# Altium PCB CopterControl.PcbDoc (part 2 of 2)
Units mil, origin at the board's own origin, x right, y up, seen from the top; angles counter-clockwise.
Board outline 1417.32 x 1417.32 mil, 4 copper layers (Top Layer, Ground, Power, Bottom Layer); 93 components, 79 nets, 390 pads, 96 vias.
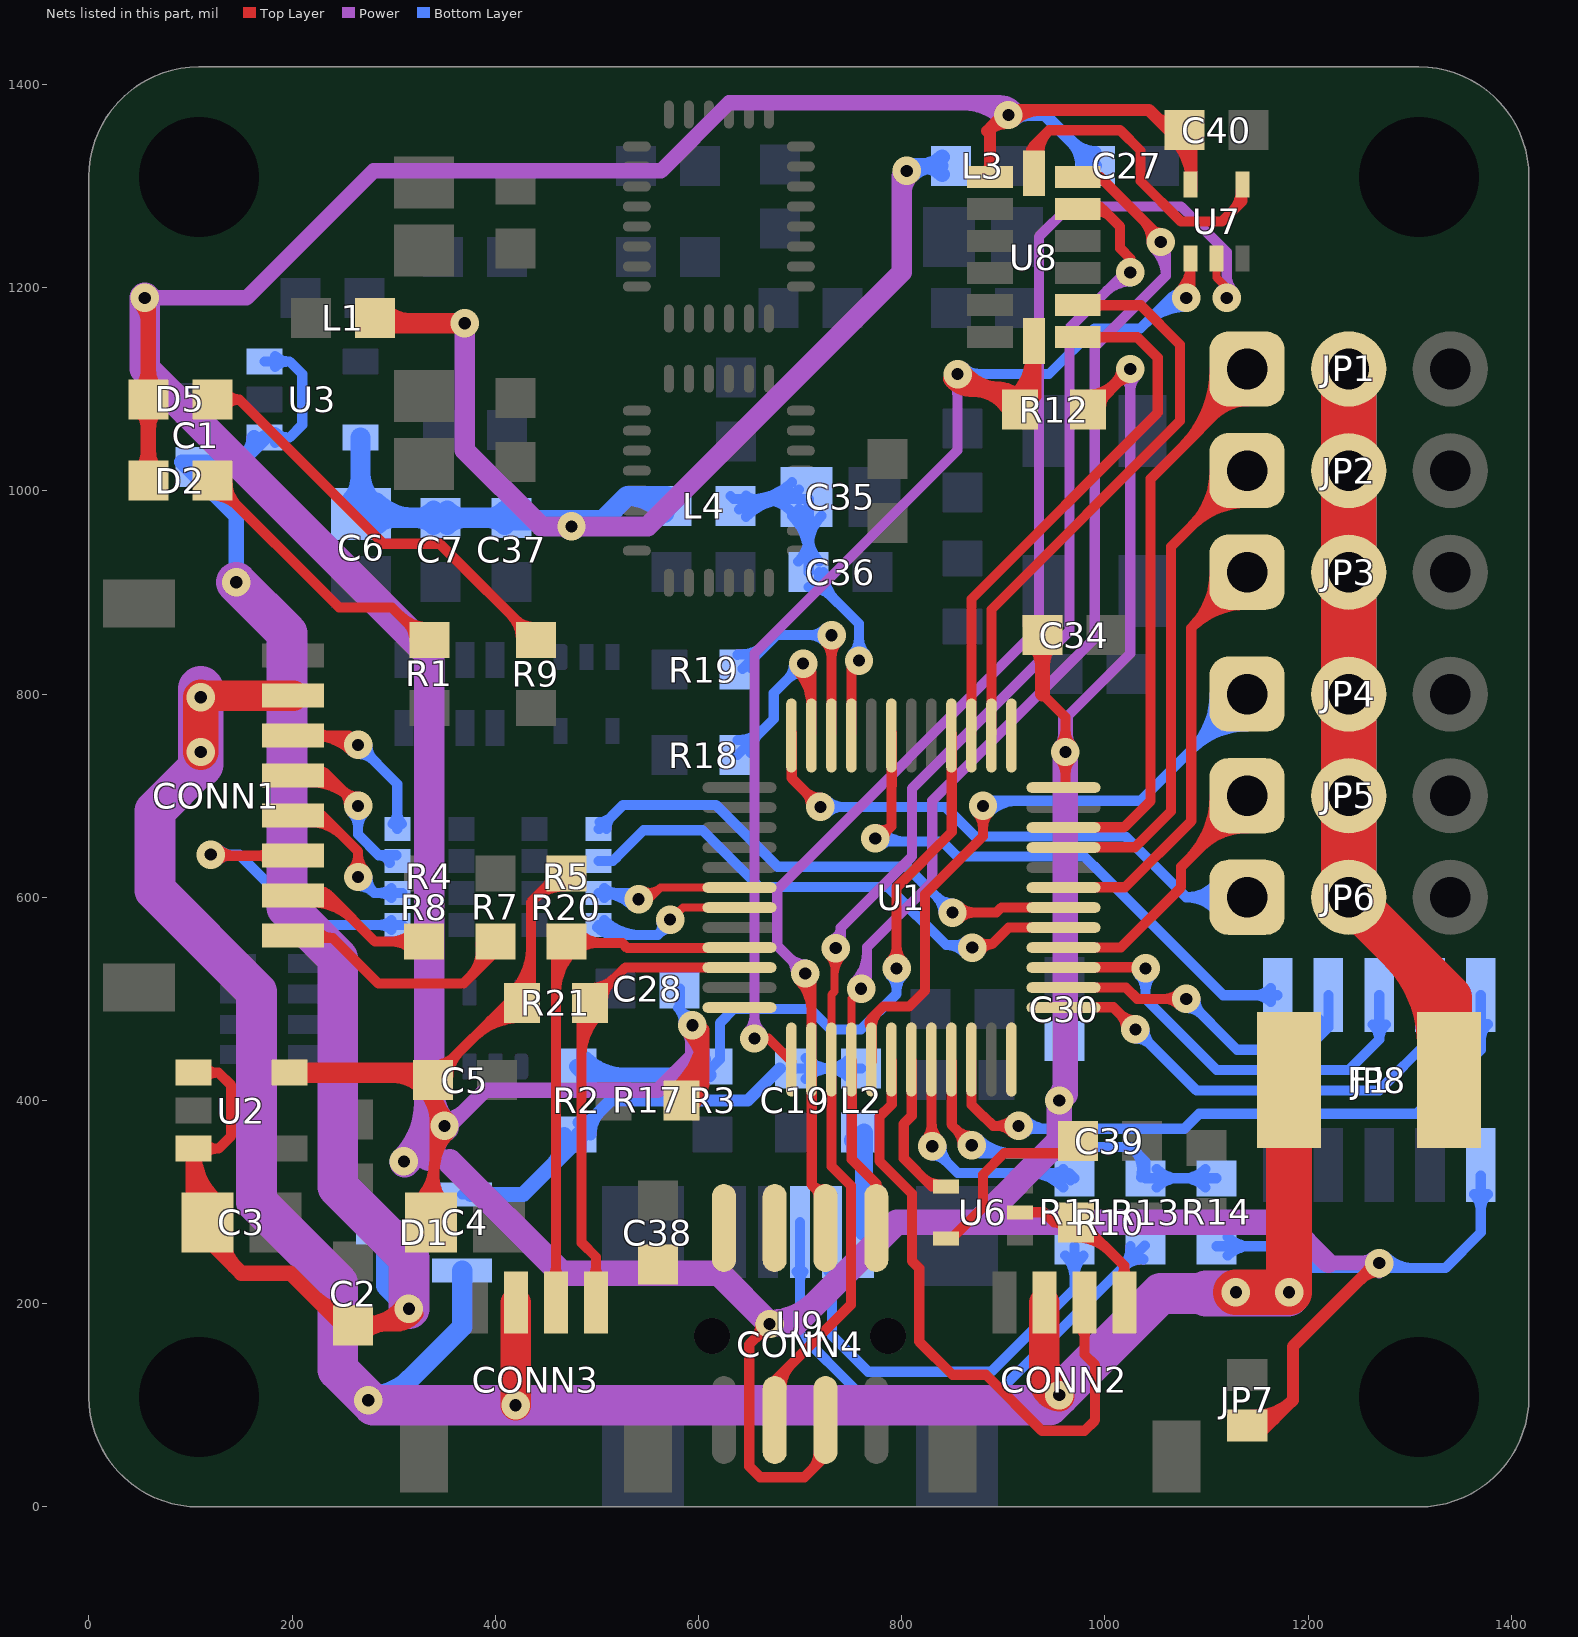
[diagram p4: the nets of this part, all layers, seen from the top]

## Via types
v1: diameter 28, hole 12, Top Layer to Bottom Layer, tented both sides, 96 vias

## Nets (pads, with @x,y where several pads share a name; then routed paths per layer and width w, separated by ;. In a path a pad name is that pad's centre, name@x,y a point inside that pad or via, vN(x,y) a via of type N, cw(c..) or ccw(c..) an arc to the next point about the centre after c; other vN are vias at no path point) (continued)
NetC35_2: C35.2 C36.2 L4.2 U1.9 | length 768.6
  Top Layer w10: U1.9@750.54,761.17 750.54,825.54 v1(758,833)
  Bottom Layer w10: L4.2@631.5,995 634.46,992.03 708.5,992.03 C36.2@708.5,920 ; L4.2@639.81,981.69 cw(c664.78,956.71) 664.78,992.03 ; L4.2@646.88,974.62 cw(c688.92,932.57) C35.2@688.92,992.03 ; L4.2@646.88,995.38 ccw(c654.97,1003.48) L4.2@654.97,992.03 ; L4.2@652.07,992.03 ccw(c652.07,1048.46) C35.2@691.98,1008.56 ; 661.58,992.03 cw(c661.58,949.04) C35.2@691.98,979.44 ; 676.22,992.03 ccw(c676.22,1024.32) C35.2@699.05,1001.49 ; C35.2@691.98,975.5 cw(c652.07,935.6) C36.2@708.5,935.6 ; C36.2@698.12,930.38 ccw(c673.05,955.45) 708.5,955.45 ccw(c743.96,955.45) C36.2@718.89,930.38 ; C35.2@699.05,982.57 cw(c676.22,959.74) 708.5,959.74 ; C36.2@708.5,905.31 cw(c708.5,873.05) 731.32,895.86 ; 708.5,945.11 cw(c751.49,945.11) C35.2@721.1,975.5 ; C36.2@718.5,920 718.5,908.68 758,869.18 v1(758,833) v1@755,830 ; C36.2@723.19,920 ccw(c761.83,920) 734.51,892.68 ; v1@751.64,839.36 ccw(c736.27,854.73) 758,854.73 ccw(c779.73,854.73) v1@764.36,839.36
NetCONN1_3: CONN1.3 R4.8 | length 315.9
  Top Layer w10: CONN1.3@201.1,759.06 255.94,759.06 v1(265,750) ; CONN1.3@221.41,759.06 cw(c221.41,706.41) v1@258.64,743.64 ; CONN1.3@224.62,754.24 cw(c236.25,742.61) 236.25,759.06 cw(c236.25,775.5) CONN1.3@224.62,763.87 ; 245.55,759.06 cw(c245.55,730.55) v1@265.71,750.71
  Bottom Layer w10: v1@265,741 cw(c265,719.27) 280.36,734.64 cw(c295.73,750) v1@274,750 ; v1(265,750) 303.5,711.5 R4.8@303.5,667.24 ; R4.8@298.69,672.06 ccw(c287.06,683.69) 303.5,683.69 ccw(c319.95,683.69) R4.8@308.32,672.06
NetCONN1_4: CONN1.4 R4.7 | length 361.3
  Top Layer w10: CONN1.4@201.1,719.69 235.32,719.69 ; CONN1.4@218.06,722.36 cw(c225.15,711.46) 234.35,720.65 ; CONN1.4@219.8,712.87 cw(c219.8,658.98) v1@257.91,697.09 ; CONN1.4@219.8,722.87 cw(c219.8,693.12) 240.84,714.16 ; CONN1.4@223.52,713.98 cw(c232.03,700.89) 243.07,711.93 ; CONN1.4@224.82,715.08 cw(c235.31,705.43) 235.31,719.68 ; CONN1.4@224.82,724.29 ccw(c235.31,733.94) 235.31,719.69 ; v1@256,690 ccw(c234.27,690) 249.64,705.36 ccw(c265,720.73) v1@265,699 ; v1(265,690) 235.32,719.69
  Bottom Layer w10: v1@258.64,683.64 cw(c243.27,668.27) 265,668.27 cw(c286.73,668.27) v1@271.36,683.64 ; v1(265,690) 265,661.77 285.32,641.45 ; R4.7@296.04,633.65 ccw(c285.32,630.19) 285.32,641.45 ; R4.7@302.8,641.45 285.32,641.45
NetCONN1_5: CONN1.5 R4.6 | length 279.3
  Top Layer w10: CONN1.5@201.1,680.31 229.68,680.31 265,645 v1(265,620) ; CONN1.5@219.8,673.5 cw(c219.8,633.2) 248.3,661.7 ; v1@258.64,626.36 ccw(c243.27,641.73) 265,641.73 ccw(c286.73,641.73) v1@271.36,626.36
  Bottom Layer w10: v1@265,611 cw(c265,589.27) 280.36,604.64 cw(c295.73,620) v1@274,620 ; v1(265,620) 280.75,604.25 R4.6@308.5,604.25 ; R4.6@297.7,599.44 ccw(c286.08,587.81) 286.08,604.25 ccw(c286.08,620.7) R4.6@297.7,609.07
NetCONN1_6: CONN1.6 R4.5 | length 418.2
  Top Layer w10: v1@120,640.94 CONN1.6@201.1,640.94 ; v1@126.36,635.64 cw(c139.18,622.82) 139.18,640.94 ; v1@126.36,648.36 ccw(c144.28,666.28) 144.28,640.94 ; CONN1.6@177.59,636.13 ccw(c165.96,624.5) 165.96,640.94 ccw(c165.96,657.39) CONN1.6@177.59,645.76
  Bottom Layer w10: v1(120,642) 148,642 217.24,572.76 R4.5@308.5,572.76 ; v1@126.36,635.64 cw(c141.73,620.27) 141.73,642 cw(c141.73,663.73) v1@126.36,648.36 ; R4.5@297.7,567.94 ccw(c286.08,556.31) 286.08,572.76 ccw(c286.08,589.2) R4.5@297.7,577.57
NetCONN1_7: CONN1.7 R8.2 | length 333.9
  Top Layer w10: CONN1.7@201.1,601.57 236.43,601.57 281.46,556.54 R8.2@330,556.54 ; CONN1.7@218.13,604.29 cw(c225.64,592.08) 235.78,602.22 ; CONN1.7@219.8,594.76 cw(c219.8,538.19) 259.81,578.19 ; CONN1.7@219.8,604.76 cw(c219.8,572.33) 242.73,595.27 ; CONN1.7@223.37,595.77 cw(c232.47,580.99) 244.74,593.26 ; CONN1.7@224.62,596.76 cw(c236.25,585.13) 236.25,601.57 cw(c236.25,618.02) CONN1.7@224.62,606.39 ; R8.2@319.04,547.54 ccw(c297.33,525.84) 297.33,556.54 ccw(c297.33,587.24) R8.2@319.04,565.53
NetCONN1_8: CONN1.8 R7.2 | length 309.9
  Top Layer w10: CONN1.8@201.1,562.2 201.1,559.9 240.1,559.9 ; CONN1.8@224.89,566.73 ccw(c240.1,580.24) 240.1,559.9 ; 374.45,520.99 ccw(c346.77,548.67) R7.2@385.46,554.61 ; 388.41,534.95 ccw(c370.97,552.38) R7.2@395.35,556.12 ; R7.2@400,546.54 368.46,515 285,515 240.1,559.9
NetCONN2_4: CONN2.4 R10.2 U6.2 | length 278.5
  Top Layer w10: U6.2@916.42,290 940,290 950,280 ; R10.2@960.4,273.86 ccw(c950,268.12) 950,280 ; R10.2@960.4,286.14 cw(c950,291.88) 950,280 ; R10.2@971.54,265.31 cw(c971.54,217.79) 1005.14,251.4 ; R10.2@971.54,275.31 cw(c971.54,251.93) R10.2@988.07,268.47 ; R10.2@984.25,278.03 ccw(c998.13,278.03) R10.2@988.32,268.22 ; CONN2.4@1014.24,224.62 ccw(c1002.61,236.25) 1019.06,236.25 ccw(c1035.5,236.25) CONN2.4@1023.87,224.62 ; CONN2.4@1019.06,201.1 1019.06,237.48 976.54,280 950,280
NetCONN4_2: CONN4.2 R11.2 | length 507.3
  Bottom Layer w10: CONN4.2@728.07,231.62 cw(c719.81,223.35) 731.5,223.35 cw(c743.19,223.35) CONN4.2@734.92,231.62 ; CONN4.2@731.5,280.47 CONN4.2@731.5,270.47 731.5,168.5 767,133 888,133 970,215 R11.2@970,256.54 ; R11.2@961.01,247.54 cw(c939.3,225.84) 970,225.84 cw(c1000.7,225.84) R11.2@978.99,247.54
NetCONN4_3: CONN4.3 R13.2 | length 612.1
  Bottom Layer w10: CONN4.3@696.58,231.62 cw(c688.31,223.35) 700,223.35 cw(c711.69,223.35) CONN4.3@703.42,231.62 ; CONN4.3@700,280.47 CONN4.3@700,270.47 700,170 755,115 897,115 914.96,132.96 ; 905,123 R13.2@1039.27,257.27 ; 1015.97,233.97 ccw(c993.4,256.54) R13.2@1025.32,256.54 ; 1017.18,235.18 cw(c1038.03,214.34) R13.2@1038.03,243.82
NetD2_1: D2.1 R1.2 | length 377.3
  Top Layer w10: D2.1@121.5,995.31 cw(c121.5,959.86) 146.56,984.93 cw(c171.63,1010) D2.1@136.18,1010 ; D2.1@121.5,1010 246.26,885.23 298.23,885.23 R1.2@330,853.46 ; 306.15,877.32 ccw(c333.03,904.2) R1.2@333.03,866.18 ; 313.47,870 cw(c296.93,853.46) R1.2@320.32,853.46
NetD5_1: D5.1 R9.1 | length 517.2
  Top Layer w10: D5.1@121.5,1090 148,1090 ; D5.1@133.95,1082.21 cw(c148,1073.43) 148,1090 ; D5.1@133.95,1097.79 ccw(c148,1106.57) 148,1090 ; 414.93,878.53 cw(c389.86,853.46) R9.1@425.32,853.46 ; 419.68,873.78 ccw(c438.03,892.13) R9.1@438.03,866.18 ; R9.1@426,850 R9.1@445,850 ; R9.1@440,853.46 345.46,948 290,948 148,1090
NetR12_1: R12.1 U1.25 U7.1 U8.7 | length 1757.4
  Top Layer w8: U1.25@691.49,438.34 U1.25@691.68,438.53
  Top Layer w10: v1(655,461) 668.83,461 U1.25@691.49,438.34 ; v1@1073.64,1196.36 ccw(c1047.63,1222.37) U7.1@1084.41,1222.37 ; v1(1080,1190) 1084.41,1194.41 U7.1@1084.41,1228.58
  Top Layer w15: v1@848.06,1110.09 ccw(c867.56,1123.88) 867.56,1100 ; v1@855,1108.5 cw(c855,1092.81) 866.1,1103.9 cw(c877.19,1115) v1@861.5,1115 ; v1(855,1115) 870,1100 ; v1@860.31,1118.75 ccw(c896.53,1144.37) 896.53,1100 ; 894.71,1100 cw(c894.71,1070.62) R12.1@920.78,1084.18 ; 897.52,1099.01 ccw(c914.2,1115.7) R12.1@915.83,1092.16 ; R12.1@900.49,1096.05 cw(c886.41,1081.97) R12.1@906.32,1081.97 ; R12.1@907.47,1077.25 ccw(c870,1057.76) 870,1100 ; R12.1@909.52,1089.39 ccw(c864.6,1136.93) 930,1136.93 930,1093.46 R12.1@916.54,1080 896.54,1100 ; R12.1@919.82,1078.49 ccw(c897.5,1102.11) 930,1102.11 ; 870,1100 896.54,1100
  Power w10: v1@648.64,467.36 ccw(c633.27,482.73) 655,482.73 ccw(c676.73,482.73) v1@661.36,467.36 ; v1(655,461) 655,840 855,1040 v1(855,1115) ; v1@848.64,1108.64 cw(c833.27,1093.27) 855,1093.27 cw(c876.73,1093.27) v1@861.36,1108.64
  Bottom Layer w10: v1(855,1115) 945,1115 990,1160 1035,1160 1065,1190 ; v1@861.36,1108.64 cw(c876.73,1093.27) 876.73,1115 cw(c876.73,1136.73) v1@861.36,1121.36 ; 1039.03,1164.03 cw(c1080,1123.06) v1@1080,1181 ; 1056.1,1181.1 cw(c1080,1157.2) v1@1080,1191 ; 1057.5,1182.5 cw(c1066.18,1173.82) v1@1074.16,1183.16 ; 1065.15,1190.15 cw(c1073.23,1182.07) v1@1080.65,1190.76 ; v1@1072.06,1185.77 ccw(c1065,1182) 1065,1190 ; v1@1072.06,1194.23 cw(c1065,1198) 1065,1190 ; v1(1080,1190) 1065,1190
NetU1_2: U1.2 U8.9 | length 598.7
  Top Layer w10: U1.2@888.34,761.17 888.34,883.34 1074,1069 1074,1144 1035.24,1182.76 U8.9@973.21,1182.76 ; U8.9@989.04,1178.64 cw(c998.99,1168.69) 998.99,1182.76 cw(c998.99,1196.82) U8.9@989.04,1186.88
NetU1_3: U1.3 U8.8 | length 555.2
  Top Layer w10: U1.3@868.65,761.17 868.65,893.65 1052,1077 1052,1131.18 1031.92,1151.26 U8.8@973.21,1151.26 ; U8.8@989.04,1147.14 cw(c998.99,1137.19) 998.99,1151.26 cw(c998.99,1165.33) U8.8@989.04,1155.38
NetU1_26: U1.26 U7.2 U9.6 | length 1569.5
  Top Layer w8: U7.2@1107.96,1220.63 cw(c1103.02,1215.7) 1110,1215.7 cw(c1116.98,1215.7) U7.2@1112.04,1220.63 ; U7.2@1110,1228.58 1110,1210 v1@1130,1190 ; 1114.37,1205.63 cw(c1103.78,1195.03) v1@1118.09,1190.59
  Top Layer w10: v1@698.64,518.64 cw(c668.37,488.37) 711.17,488.37 ; v1(705,525) 711.17,518.83 U1.26@711.17,438.34 ; U1.26@711.42,438.58 711.42,317.22 725,303.63 U9.6@725,264.49 ; 712.59,316.04 ccw(c721.3,324.74) U9.6@723.68,312.67 ; 715.04,313.6 cw(c707.42,305.98) U9.6@718.19,305.98
  Power w10: v1@696,525 ccw(c674.27,525) 689.64,540.36 ccw(c705,555.73) v1@705,534 ; v1(705,525) 677.54,552.46 677.54,607.54 935,865 935,1250 965,1280 1075,1280 1120,1235 v1(1120,1190) ; v1@1113.64,1196.36 ccw(c1098.27,1211.73) 1120,1211.73 ccw(c1141.73,1211.73) v1@1126.36,1196.36
NetU1_27: U1.27 U8.12 U9.2 | length 1574.3
  Top Layer w8: v1@727.93,542.93 cw(c713.27,528.27) 734,528.27 ; U1.27@730.86,438.34 730.86,504.14 734,507.28 734,544 740,550 v1(735,550) ; 734,523.44 cw(c761.56,523.44) v1@742.07,542.93
  Top Layer w10: U9.2@675,85.51 675,124 750,199 750,315.27 ; U9.2@681.81,117.01 cw(c715.13,117.01) 691.57,140.57 ; U1.27@730.83,437.79 730.83,335.24 749.81,316.26 ; U8.12@973.21,1277.24 997.76,1277.24 ; U8.12@982.6,1280.71 cw(c988.31,1272.18) U8.12@995.56,1279.44 ; U8.12@988.16,1272.4 cw(c995.21,1261.86) 1004.17,1270.83 ; U8.12@989.31,1273.41 cw(c997.76,1266.02) 997.76,1277.24 ; U8.12@989.31,1281.08 ccw(c997.76,1288.46) 997.76,1277.24 ; 1020.81,1232.94 cw(c1007.1,1219.22) v1@1025.97,1214.77 ; v1(1025,1215) 1025,1228.75 1015,1238.75 1015,1260 997.76,1277.24
  Power w10: v1@731.92,558.46 ccw(c727.72,570) 740,570 ; v1(735,550) 740,550 740,570 ; 1001.1,1196.1 cw(c1025,1172.2) v1@1025,1206 ; v1@1022.5,1217.5 965,1160 965,862 810,707 810,640 740,570
NetU1_28: U1.28 U8.13 U9.5 | length 1322.3
  Top Layer w8: U1.28@750.54,438.34 v1@750.54,500.54 ; U8.13@973.21,1308.74 U8.13@995.4,1308.74
  Top Layer w10: U1.28@750.79,438.58 750.79,342.21 775,318 ; U9.5@771.07,298.47 U9.5@775,294.54 ; U9.5@771.5,311.83 ccw(c767.81,318) 775,318 ; U9.5@775,264.49 775,318 ; U9.5@778.5,311.83 cw(c782.19,318) 775,318 ; U8.13@995.4,1308.74 v1@1049.57,1254.57 ; 1036.71,1267.43 cw(c1014.27,1245) v1@1046,1245 ; 1046.71,1257.44 ccw(c1055,1265.73) v1@1055,1254
  Power w8: v1(760,510) v1@766,516
  Power w10: v1@753.64,516.36 ccw(c723.79,546.21) 766,546.21 ; v1@766,516 766,551 830,615 830,695 990,855 990,1141.82 1060,1211.82 v1@1060,1245 ; v1@1048.67,1238.6 cw(c1021.78,1211.44) 1060,1211.44
  other v1: 1055,1245
NetU7_4: U7.4 U8.14 | length 394.8
  Top Layer w10: U8.14@925.88,1328.41 ccw(c915.93,1338.36) 930,1338.36 ccw(c944.07,1338.36) U8.14@934.12,1328.41 ; U8.14@925.89,1323.54 cw(c945.84,1327.17) 931.5,1341.5 ; U8.14@930,1332.58 930,1340 945,1355 ; U8.14@935.73,1325.33 cw(c968.67,1331.32) 945,1355 ; 1125.35,1275.35 ccw(c1105.19,1295.51) U7.4@1133.7,1295.51 ; U7.4@1135.59,1301.42 1135.59,1285.59 1115,1265 1075,1265 1035,1305 1035,1335 1015,1355 945,1355
NRST: JP8.10 U1.7 | length 754.5
  Top Layer w10: v1@775,655 789.91,669.91 ; v1@776.64,666.61 ccw(c780.52,679.3) 789.91,669.91 ; v1@783,658 cw(c795.07,658) 786.54,666.54 ; U1.7@789.91,761.17 789.91,669.91 ; 790.16,710.16 U1.7@790.16,761.42
  Bottom Layer w10: v1@775,655 840,655 855,640 980,640 1017.5,602.5 ; v1@780.36,651.64 cw(c788.49,643.51) 788.49,655 ; v1@780.36,664.36 ccw(c802.97,686.97) 802.97,655 ; 990,630 1017.5,602.5 ; JP8.10@1163.24,496.9 ccw(c1146.9,480.56) 1146.9,503.66 ccw(c1146.9,526.76) JP8.10@1163.24,510.43 ; JP8.10@1170,503.66 1116.34,503.66 1017.5,602.5
  other v1: 774,658
S1_IN: R5.1 U1.42 | length 609.5
  Top Layer w10: v1(850,585) 893.18,585 898.1,589.91 U1.42@961.17,589.91 ; v1@856.36,578.64 cw(c871.73,563.27) 871.73,585 cw(c871.73,606.73) v1@856.36,591.36
  Bottom Layer w10: R5.1@501.5,667.24 502.24,667.24 526,691 617,691 678,630 805,630 v1(850,585) ; R5.1@502.48,674.06 ccw(c502.48,689.93) R5.1@513.7,678.7 ; R5.1@509.29,667.24 cw(c526.31,667.24) 514.27,679.27 ; v1@841,585 ccw(c819.27,585) 834.64,600.36 ccw(c850,615.73) v1@850,594
S1_OUT: JP1.1 U1.46 | length 810.5
  Top Layer w10: U1.46@961.42,668.9 1018.9,668.9 1045,695 1045,1012 JP1.1@1143.27,1110.27 ; 1076.18,1043.18 ccw(c999.36,1120) JP1.1@1108,1120 ; 1093.25,1060.25 ccw(c1033.5,1120) JP1.1@1118,1120 ; 1107.56,1074.56 cw(c1140,1042.13) JP1.1@1140,1088 ; 1110.32,1077.32 ccw(c1067.64,1120) JP1.1@1128,1120 ; JP1.1@1140,1095 JP1.1@1140,1120
S2_IN: R5.2 U1.41 | length 592
  Top Layer w10: v1@873.18,550 870,550 v1(869.44,550.56) 872.81,553.92 888.92,553.92 ; v1@875.81,556.92 ccw(c883.04,564.16) 883.04,553.92 ; v1@877.59,546.73 cw(c888.92,541.4) 888.92,553.92 ; U1.41@961.17,570.23 905.23,570.23 888.92,553.92
  Bottom Layer w10: R5.2@501.5,635.75 515.75,635.75 519,639 519,639.18 545.82,666 604,666 660,610 786.82,610 843.82,553 ; 853.62,553 ccw(c853.62,566.38) v1@863.08,556.92 ; v1@862.74,544.55 ccw(c843.82,527.59) 843.82,553 ; v1@876.18,553 843.82,553
S2_OUT: JP2.1 U1.45 | length 689.5
  Top Layer w10: U1.45@961.42,649.21 1029.67,649.21 1065,684.54 1065,945 JP2.1@1140,1020 ; JP2.1@1108,1020 cw(c1030.75,1020) 1085.37,965.37 cw(c1140,910.75) JP2.1@1140,988 ; JP2.1@1118,1020 cw(c1064.89,1020) 1102.44,982.44 cw(c1140,944.89) JP2.1@1140,998
S3_IN: R5.3 U1.18 | length 255
  Top Layer w8: v1(541.09,598) 541.09,599.09 542,600 545,600 545,598 v1@543,598 ; v1@542,599.78 ccw(c547.01,609.62) 554.81,601.81 ; v1@545.63,606.91 ccw(c552.26,619.93) 562.6,609.6 ; v1@550.27,597.27 562.6,609.6 ; U1.18@638,609 637.4,609.6 562.6,609.6
  Top Layer w10: U1.18@637.4,609.6 U1.18@638.34,609.6
  Bottom Layer w10: R5.3@501.5,604.25 v1@537,604.25 ; R5.3@504.27,604.25 cw(c504.27,561.18) v1@534.72,591.64 ; R5.3@507.3,599.44 cw(c518.92,587.81) 518.92,604.25 cw(c518.92,620.7) R5.3@507.3,609.07 ; 528.41,604.25 cw(c528.41,585.32) v1@541.8,598.71 ; v1(541.09,598) 541.09,599.09 542,600 545,600 545,598 v1@543,598
S3_OUT: JP3.1 U1.43 | length 623.1
  Top Layer w10: U1.43@961.42,609.84 1019.84,609.84 1085,675 1085,865 JP3.1@1140,920 ; JP3.1@1108,920 cw(c1030.75,920) 1085.37,865.37 cw(c1140,810.75) JP3.1@1140,888 ; JP3.1@1118,920 cw(c1064.89,920) 1102.44,882.44 cw(c1140,844.89) JP3.1@1140,898
S4_IN: R5.4 U1.19 | length 233.7
  Top Layer w8: v1@575,580 584.91,589.91 U1.19@638.34,589.91
  Bottom Layer w10: R5.4@500.23,570.5 ccw(c518.33,588.61) 518.33,563 ; R5.4@501.5,572.76 504,572.76 513.76,563 560,563 575,578 v1@575,577.09 ; R5.4@507.3,577.57 ccw(c542.48,612.75) 542.48,563 ; 561.5,564.5 ccw(c554.78,571.22) v1@563.62,574.7 ; 561.76,564.76 cw(c572,554.51) v1@572,569
  other v1: 572,578
S4_OUT: JP4.1 U1.29 | length 913.2
  Top Layer w10: U1.29@770.38,471.66 cw(c775.22,476.32) 770.47,481.07 ; U1.29@770.47,438.58 770.47,481.07 ; U1.29@770.44,471.51 cw(c793.46,471.51) 777.18,487.78 ; v1@873.64,683.64 cw(c858.27,668.27) 880,668.27 cw(c901.73,668.27) v1@886.36,683.64 ; v1(880,690) 880,660 823,603 823,508 807.68,492.68 782.08,492.68 770.47,481.07
  Bottom Layer w10: v1@880,695 1035,695 JP4.1@1140,800 ; v1@886.36,683.64 cw(c913.8,656.2) 913.8,695 ; JP4.1@1108,800 cw(c1030.75,800) 1085.37,745.37 cw(c1140,690.75) JP4.1@1140,768 ; JP4.1@1118,800 cw(c1064.89,800) 1102.44,762.44 cw(c1140,724.89) JP4.1@1140,778
S5_IN: R19.1 U1.10 | length 314.5
  Top Layer w10: v1@724.64,851.64 cw(c709.62,836.62) 730.86,836.62 ; U1.10@730.86,761.17 v1@730.86,858 ; 730.86,835.93 cw(c753.07,835.93) v1@737.36,851.64
  Bottom Layer w10: R19.1@638.46,838.69 ccw(c638.46,883.79) 670.36,851.9 ; R19.1@643.46,825 676.46,858 v1(731,858) ; R19.1@651.18,825.97 cw(c667.47,825.97) R19.1@655.95,837.49 ; v1@724.64,851.64 ccw(c709.27,836.27) 709.27,858 ccw(c709.27,879.73) v1@724.64,864.36
S5_OUT: JP5.1 U1.40 | length 560.8
  Top Layer w10: 998.54,550.54 U1.40@959.2,550.54 1015.54,550.54 1075,610 1075,630 1145,700 JP5.1@1120,700 ; 1081.84,636.84 ccw(c1018.67,700) JP5.1@1108,700 ; 1093.91,648.91 cw(c1140,602.82) JP5.1@1140,668 ; 1098.91,653.91 ccw(c1052.82,700) JP5.1@1118,700 ; 1110.98,665.98 cw(c1140,636.96) JP5.1@1140,678 ; JP5.1@1115.98,670.98 ccw(c1086.96,700) JP5.1@1128,700
S6_IN: R18.1 U1.11 | length 330.3
  Top Layer w10: v1@696.64,823.64 cw(c661.54,788.54) U1.11@711.17,788.54 ; v1(703,830) 711.17,821.83 U1.11@711.17,761.17 ; v1@703.71,830.71 cw(c685.68,812.68) 711.17,812.68
  Bottom Layer w10: R18.1@638.46,740 674,775.54 674,801 v1(703,830) ; R18.1@638.46,754.69 ccw(c638.46,790.14) 663.53,765.07 ; R18.1@651.18,741.97 cw(c677.13,741.97) 658.78,760.32 ; v1@694,830 cw(c672.27,830) 687.64,814.64 cw(c703,799.27) v1@703,821
S6_OUT: JP6.1 U1.12 | length 751.4
  Top Layer w10: U1.12@691.73,761.42 691.73,717.29 v1(720,689.02) v1@720,680 ; v1@711,689.02 ccw(c689.27,689.02) 704.64,704.38 ccw(c720,719.75) v1@720,698.02
  Bottom Layer w10: v1(720,689.02) 842.8,689.02 871.82,660 1020,660 1080,600 ; v1@726.36,682.66 cw(c741.73,667.29) 741.73,689.02 cw(c741.73,710.75) v1@726.36,695.38 ; JP6.1@1113.43,582.17 ccw(c1080,559.75) 1080,600 ; JP6.1@1113.43,617.83 cw(c1080,640.25) 1080,600 ; JP6.1@1121.73,587.74 ccw(c1098.75,572.33) 1098.75,600 ccw(c1098.75,627.67) JP6.1@1121.73,612.26 ; JP6.1@1140,600 1080,600
TCLK: JP8.4 U1.37 | length 558.3
  Top Layer w10: U1.37@961.42,491.73 1008.27,491.73 v1(1030,470) ; v1@1021,470 ccw(c999.27,470) 1014.64,485.36 ccw(c1030,500.73) v1@1030,479
  Bottom Layer w10: v1@1030,461 cw(c1030,439.27) 1045.36,454.64 cw(c1060.73,470) v1@1039,470 ; v1(1030,470) 1090,410 1270,410 1320,460 ; JP8.4@1313.52,474.77 cw(c1299.92,460) 1320,460 ; JP8.4@1320,503.66 1320,460 ; JP8.4@1326.48,474.77 ccw(c1340.08,460) 1320,460
TDI: JP8.8 U1.38 | length 420.2
  Top Layer w10: U1.38@961.42,511.08 1020.74,511.08 1031.82,500 1055,500 v1(1080,500) ; v1@1073.64,493.64 ccw(c1058.27,478.27) 1058.27,500 ccw(c1058.27,521.73) v1@1073.64,506.36
  Bottom Layer w10: v1@1080,491 cw(c1080,469.27) 1095.36,484.64 cw(c1110.73,500) v1@1089,500 ; v1(1080,500) 1130,450 1198,450 1220,472 JP8.8@1220,503.66 ; 1202.91,454.91 ccw(c1183.1,474.71) JP8.8@1210.61,480
TDO: JP8.6 U1.39 | length 491
  Top Layer w10: U1.39@961.42,531.1 v1@1040,531.1
  Bottom Layer w10: v1@1033.64,523.64 cw(c1018.27,508.27) 1040,508.27 cw(c1061.73,508.27) v1@1046.36,523.64 ; v1(1040,530) 1040,500 1110,430 1240,430 1270,460 ; JP8.6@1263.52,474.77 cw(c1249.92,460) 1270,460 ; JP8.6@1270,503.66 1270,460 ; JP8.6@1276.48,474.77 ccw(c1290.08,460) 1270,460
TMS: JP8.2 U1.34 | length 742.9
  Top Layer w10: U1.34@868.65,438.34 868.65,395.85 880.51,384 881,384 890,375 v1(915,375) ; v1@908.64,368.64 ccw(c893.27,353.27) 893.27,375 ccw(c893.27,396.73) v1@908.64,381.36
  Bottom Layer w10: v1@915,372.18 1078.04,372.18 1092.86,387 1307,387 1370,450 JP8.2@1370,503.66 ; v1@921.36,368.64 cw(c929.92,360.08) 929.92,372.18 ; v1@921.36,381.36 ccw(c943.53,403.53) 943.53,372.18 ; JP8.2@1363.24,475.05 cw(c1346.9,458.71) 1370,458.71 cw(c1393.1,458.71) JP8.2@1376.76,475.05
TO_REGS: C1.1 C2.1 C3.1 D1.3 U2.1 U2.3 U3.1 U3.3 | length 2266.9
  Top Layer w10: U2.3@102.76,352.6 127.6,352.6 140,365 140,415 127.6,427.4 U2.1@102.76,427.4 ; U2.3@113.19,347.09 cw(c126.5,333.78) 126.5,352.6 cw(c126.5,371.42) U2.3@113.19,358.11 ; U2.1@113.19,421.89 cw(c126.5,408.58) 126.5,427.4 cw(c126.5,446.22) U2.1@113.19,432.91 ; C3.1@116.54,263.46 C3.1@116.54,280
  Top Layer w15: 102.76,320.28 ccw(c147.25,320.28) C3.1@118.53,286.3 ; C3.1@116.54,263.46 150,230 198.5,230 C2.1@253.5,175 ; C3.1@116.54,280 102.76,293.78 U2.3@102.76,352.6 ccw(c174.56,352.6) C3.1@128.21,297.75 ; C3.1@134.06,271.56 ccw(c169.78,262.38) 143.7,236.3 ; 222.13,206.38 ccw(c260,244.25) C2.1@260,190.69 ; C2.1@266.5,175 C2.1@271.5,180 ; C2.1@268.62,169.89 cw(c293.03,145.48) 293.03,180 ; C2.1@268.62,187.12 ccw(c285.81,204.31) 285.81,180 ; 301.85,180 ccw(c301.85,205.06) v1@321.75,189.84 ; v1@308.5,195 cw(c292.81,195) 303.9,183.9 cw(c315,172.81) v1@315,188.5 ; v1@309.84,198.95 cw(c271.5,228.26) C2.1@271.5,180 ; v1(315,195) 300,180 C2.1@271.5,180
  Top Layer w20: C2.1@253.5,175 C2.1@266.5,175
  Power w40: v1(145,910) 195,860 195,590 245,540 245,315 315,245 v1(315,195)
  Bottom Layer w10: U3.1@172.76,1052.6 197.6,1052.6 210,1065 210,1115 197.6,1127.4 U3.3@172.76,1127.4 ; U3.1@183.19,1047.09 cw(c196.5,1033.78) 196.5,1052.6 cw(c196.5,1071.42) U3.1@183.19,1058.11 ; U3.3@183.19,1121.89 cw(c196.5,1108.58) 196.5,1127.4 cw(c196.5,1146.22) U3.3@183.19,1132.91
  Bottom Layer w15: C1.1@113.62,1014.89 cw(c146.49,982.02) 146.49,1028.5 ; C1.1@117.18,1023.5 ccw(c167.13,1023.5) 131.81,988.19 ; v1@140.4,914.6 ccw(c129.31,925.69) 145,925.69 ccw(c160.69,925.69) v1@149.6,914.6 ; v1(145,910) 145,975 91.5,1028.5 148.66,1028.5 U3.1@172.76,1052.6 ; 155.32,1035.16 ccw(c137.87,1052.6) U3.1@162.54,1052.6
  Bottom Layer w20: D1.3@292.6,270 292.6,217.4 v1(315,195)
UART1_RX: U1.31 U6.4 | length 171
  Top Layer w10: U1.31@809.84,438.58 809.84,384.84 802,377 802,343 829.41,315.59 U6.4@843.58,315.59 ; 820.34,324.66 ccw(c837.68,342) U6.4@837.68,317.48
UART1_TX: CONN2.3 U1.30 | length 677.8
  Top Layer w10: U1.30@790.16,438.58 790.16,396.1 778,383.94 778,340.46 810,308.46 810,242.33 817.33,235 817.33,162.67 850,130 883,130 938,75 980,75 990.38,85.38 990.38,139.62 980,150 CONN2.3@980,200.79 ; CONN2.3@974.87,177.59 cw(c962.48,165.2) 980,165.2 ; CONN2.3@979.68,201.1 CONN2.3@979.68,222.44 ; 980,166.72 cw(c995.37,166.72) CONN2.3@984.5,177.59
UART3_RX: CONN3.4 R21.1 U1.22 | length 607.6
  Top Layer w10: 485,443.66 cw(c543.52,443.66) R21.1@502.14,485.04 ; 485,467.8 cw(c519.38,467.8) R21.1@495.07,492.11 ; R21.1@493.15,496 528.01,530.86 U1.22@638.34,530.86 ; R21.1@493.15,510.69 ccw(c493.15,546.14) 518.22,521.07 ; CONN3.4@494.24,224.62 ccw(c482.61,236.25) 499.06,236.25 ccw(c515.5,236.25) CONN3.4@503.87,224.62 ; CONN3.4@499.06,201.1 499.06,245.94 485,260 485,475 R21.1@500,490 ; R21.1@505.87,497.97 cw(c531.81,497.97) 513.47,516.32
UART3_TX: CONN3.3 R20.1 U1.21 | length 664.8
  Top Layer w10: CONN3.3@454.87,224.62 ccw(c443.24,236.25) 459.69,236.25 ccw(c476.13,236.25) CONN3.3@464.5,224.62 ; CONN3.3@459.68,201.1 R20.1@459.68,546.54 ; 459.68,505.68 cw(c518.88,505.68) R20.1@477.02,547.54 ; 459.68,529.83 cw(c494.74,529.83) R20.1@469.95,554.61 ; R20.1@470,556.54 471.54,555 525,555 530,550 563.73,550 563.82,550.09 637.88,550.09 U1.21@638.34,550.54 ; R20.1@480.96,547.54 cw(c498.96,529.54) 498.96,555 ; R20.1@480.96,565.53 ccw(c506.38,590.94) 506.38,555
USB_DM: R11.1 U1.32 | length 386.6
  Top Layer w10: v1@823.64,361.36 ccw(c810.04,374.96) 829.27,374.96 ; v1@829.27,355.06 U1.32@829.27,438.64 ; 829.27,378.49 ccw(c853.49,378.49) v1@836.36,361.36
  Bottom Layer w10: v1@830,346 cw(c830,327.29) 843.23,340.52 ; v1(830,355) 830,353.75 855,328.75 964.72,328.75 R11.1@970,323.46 R11.1@956.54,323.46 ; v1@839,355 ccw(c863.75,355) 846.25,337.5 ; 924.58,328.75 cw(c924.58,280.01) R11.1@959.04,314.47 ; 948.72,328.75 cw(c948.72,304.15) R11.1@966.11,321.54 ; 950.09,328.75 ccw(c950.09,341.41) R11.1@959.04,332.46
USB_DP: R13.1 R14.2 U1.33 | length 582.4
  Top Layer w10: U1.33@849.21,438.34 849.21,376.83 849.55,376.49 849.55,375.45 v1@865,360 ; v1@860,356 ccw(c838.27,356) 853.64,371.36 ccw(c869,386.73) v1@869,365
  Bottom Layer w10: v1@865,360 v1@875,360 ; v1@868.29,355.29 ccw(c885.9,372.9) 885.9,348 ; v1(869,356) 877,348 938.75,348 944.93,354.18 1025.82,354.18 1040,340 R13.1@1040,323.46 R14.2@1110,323.46 ; v1@875.36,362.36 ccw(c910.04,397.04) 910.04,348 ; 1028.47,351.53 cw(c1008.97,332.03) R13.1@1035.43,324.23 ; R13.1@1050.96,314.47 cw(c1072.67,292.76) 1072.67,323.46 cw(c1072.67,354.16) R13.1@1050.96,332.46 ; R14.2@1099.04,314.47 ccw(c1077.33,292.76) 1077.33,323.46 ccw(c1077.33,354.16) R14.2@1099.04,332.46
USB_PWR: CONN4.1 L2.2 | length 126.3
  Bottom Layer w18: L2.2@752.44,360.95 cw(c726.98,335.48) 762.99,335.48 ; CONN4.1@762.99,270.47 L2.2@762.99,368.5
VBUS: C19.1 D1.1 L2.1 R2.1 | length 627.3
  Bottom Layer w10: D1.1@367.4,307.4 D1.1@375.87,307.4 ; C19.1@695,431.5 L2.1@760,431.5 L2.1@760.5,431.5 ; C19.1@705.38,421.11 cw(c730.45,396.04) 730.45,431.5 cw(c730.45,466.95) C19.1@705.38,441.88 ; L2.1@749.62,421.11 ccw(c724.55,396.04) 724.55,431.5 ccw(c724.55,466.95) L2.1@749.62,441.88
  Bottom Layer w12: R2.1@480,366.54 513.46,400 648.5,400 C19.1@680,431.5 ; R2.1@481.97,378.25 ccw(c481.97,401.79) 498.61,385.14 ; R2.1@493.68,366.54 cw(c526.72,366.54) 503.36,389.9
  Bottom Layer w15: D1.1@375.87,307.4 427.4,307.4 R2.1@486.54,366.54 ; 454.58,334.58 ccw(c422.62,366.54) R2.1@467.82,366.54
VBUS_SEN: R2.2 R3.2 U1.4 | length 812.5
  Top Layer w10: v1@788.64,536.36 ccw(c773.27,551.73) 795,551.73 ccw(c816.73,551.73) v1@801.36,536.36 ; v1(795,530) 795,610 849.21,664.21 U1.4@849.21,761.17
  Bottom Layer w10: R3.2@614,433.46 621,440.46 621,476 635,490 710,490 730,470 760,470 795,505 v1(795,530) ; v1@788.64,523.64 cw(c773.27,508.27) 795,508.27 cw(c816.73,508.27) v1@801.36,523.64
  Bottom Layer w15: R2.2@480,433.46 488.46,425 R3.2@610,425 ; R2.2@489.19,440.69 ccw(c527.07,478.56) 527.07,425 ; 566.93,425 ccw(c566.93,478.56) R3.2@604.81,440.69
VCC: C4.1 C5.1 C27.2 C28.2 C30.2 C34.2 C38.1 C39.1 C40.2 D2.2 D5.2 JP7.2 JP8.1 R12.2 R14.1 R17.1 R20.2 R21.2 U1.1 U1.24 U1.36 U1.48 U2.5 U6.5 U7.5 U8.1 U9.3 U9.7 U9.8 | length 9068.5
  Top Layer w10: C4.1@321.98,298.5 ccw(c278.46,342.01) 340,342.01 ; C5.1@328.12,409.62 cw(c299.44,380.94) v1@340,380.94 ; C4.1@329.05,291.43 ccw(c302.6,317.87) 340,317.87 ; C5.1@331.1,427.4 C5.1@340,418.5 ; C4.1@336.54,280 340,283.46 C5.1@340,418.5 ; C5.1@338.5,421.83 R21.2@419.45,502.78 ; C5.1@338.5,434.69 ccw(c338.5,465.71) 360.44,443.77 ; 340,325.28 ccw(c377.88,325.28) C4.1@351.1,298.5 ; 340,329.13 cw(c395.87,329.13) v1@356.36,368.64 ; 340,353.27 cw(c371.73,353.27) v1@349.29,375.71 ; 340,388.16 cw(c370.35,388.16) C5.1@348.89,409.62 ; 340,395.61 ccw(c369.09,395.61) v1@349.32,374.27 ; C5.1@353.19,420 cw(c393.07,420) 364.87,448.2 ; v1@356.12,381.6 cw(c390.3,418.5) C5.1@340,418.5 ; 378.02,461.35 cw(c426.22,413.15) R21.2@426.22,481.32 ; 395.09,478.42 cw(c426.22,447.29) R21.2@426.22,491.32 ; R21.2@417.23,506.96 ccw(c374.32,549.86) 435,549.86 ; R21.2@424.3,499.89 ccw(c398.47,525.72) 435,525.72 ; R21.2@426.22,496 435,504.78 435,595 463.46,623.46 R20.2@470,623.46 ; 438.53,598.53 cw(c468.03,569.02) R20.2@468.03,610.75 ; 449.55,609.55 ccw(c435.64,623.46) R20.2@455.32,623.46 ; v1@661,180 cw(c639.27,180) 654.64,164.64 cw(c670,149.27) v1@670,171 ; v1(670,180) 650,160 650,40 660.8,29.2 704.2,29.2 725,50 U9.3@725,85.51 ; 710.53,35.53 ccw(c692.05,54.02) U9.3@718.19,54.02 ; U6.5@843.58,264.41 849.41,264.41 880,295 880,327.24 900.76,348 C39.1@980,348 ; 938.5,800 961.17,777.33 U1.48@961.17,708.02 ; v1@954.81,736.64 cw(c939.44,721.27) 961.17,721.27 cw(c982.9,721.27) v1@967.54,736.64 ; v1@954.81,749.36 ccw(c939.44,764.73) 961.17,764.73 ccw(c982.9,764.73) v1@967.54,749.36 ; U1.48@959.05,708.18 ccw(c953.93,713.3) 961.17,713.3
  Top Layer w12: v1(55,1190) v1@58.5,1186.5 ; R17.1@576.27,411.21 ccw(c530.5,470) 605,470 605,421.54 ; R17.1@583.46,400 605,421.54 ; R17.1@583.64,401.74 ccw(c549.61,445.45) 605,445.45 ; R17.1@584.19,413.66 ccw(c585.87,440.66) 605,421.53 ; v1@588.34,468.34 cw(c548.13,428.13) 605,428.13 ; R17.1@591.01,392.28 ccw(c568.73,420.9) 605,420.9 ; R17.1@595.18,401.97 cw(c618.71,401.97) 602.07,418.61 ; v1@596.83,476.83 cw(c577.1,457.1) 605,457.1 ; U8.1@883.38,1312.15 ccw(c875.14,1320.39) 886.79,1320.39 ccw(c898.44,1320.39) U8.1@890.2,1312.15 ; 884.29,1354.29 cw(c903.04,1335.55) v1@904.54,1362.01 ; U8.1@886.79,1308.74 886.79,1356.79 905,1375 1043.5,1375 1085,1333.5 U7.5@1085,1296.42 ; v1@910.66,1364.34 cw(c936.38,1338.62) 936.38,1375 ; R12.2@983.46,1093.69 ccw(c983.46,1130.43) 1009.45,1104.45 ; R12.2@984.23,1079.23 v1(1025,1120) ; R12.2@995.18,1081.97 cw(c1015.01,1081.97) R12.2@1000.99,1095.99 ; v1@1017,1120 cw(c997.69,1120) 1011.34,1106.34 cw(c1025,1092.69) v1@1025,1112 ; 1051,1367.5 ccw(c1061.56,1378.05) C40.2@1070.4,1366.03 ; C40.2@1068.83,1345.32 cw(c1029.78,1306.28) U7.5@1085,1306.28 ; C40.2@1077.05,1341.39 cw(c1076.1,1332.54) 1085,1332.54 ; C40.2@1077.31,1353.81 cw(c1058.75,1335.25) 1085,1335.25 ; JP7.2@1144.12,77.75 ccw(c1145.81,106.41) 1166.11,86.11 ; JP7.2@1144.83,89.73 ccw(c1147.92,142.08) 1185,105 ; JP7.2@1152.5,72.5 1185,105 ; 1251.29,224.25 cw(c1270,205.54) v1@1270,232 ; 1258.44,231.4 ccw(c1249.84,240) v1@1262,240 ; v1(1270,240) 1267.04,240 1185,157.96 1185,105
  Top Layer w15: D2.2@49.89,1018.62 ccw(c29.09,1039.42) 58.5,1039.42 ccw(c87.92,1039.42) D2.2@67.12,1018.62 ; D5.2@49.89,1081.38 cw(c29.09,1060.58) 58.5,1060.58 cw(c87.92,1060.58) D5.2@67.12,1081.38 ; D5.2@49.89,1098.62 ccw(c29.09,1119.42) 58.5,1119.42 ccw(c87.92,1119.42) D5.2@67.12,1098.62 ; v1@50.4,1185.4 cw(c30.85,1165.85) 58.5,1165.85 ; D2.2@58.5,1010 D5.2@58.5,1090 v1@58.5,1186.5 ; C34.2@929.89,849.38 cw(c909.09,828.58) 938.5,828.58 cw(c967.92,828.58) C34.2@947.12,849.38 ; 938.5,800 C34.2@938.5,860
  Top Layer w20: U2.5@197.24,427.4 C5.1@331.1,427.4 ; 297.25,427.4 cw(c297.25,378.75) C5.1@331.66,413.15 ; C5.1@338.5,420 C5.1@338.5,421.83
  Power w10: v1@310,349 ccw(c310,382.8) 333.9,358.9 ; v1@316.36,333.64 cw(c331.73,318.27) 331.73,340 cw(c331.73,361.73) v1@316.36,346.36 ; v1@341,375 cw(c319.27,375) 334.64,359.64 cw(c350,344.27) v1@350,366 ; 355,340 v1(310,340) 315,340 v1(350,375) v1@355,375 ; v1@594,465.82 v1(594,474) ; 961.17,776.17 1025,840 v1(1025,1120) ; v1@1018.64,1113.64 cw(c1003.27,1098.27) 1025,1098.27 cw(c1046.73,1098.27) v1@1031.36,1113.64 ; v1@1270,230 v1(1270,240)
  Power w12: 560,1315 563,1315
  Power w15: v1(55,1190) 155,1190 280,1315 560,1315 ; v1@59.6,1185.4 cw(c70.69,1174.31) 70.69,1190 cw(c70.69,1205.69) v1@59.6,1194.6 ; v1@350,381.5 ccw(c350,409.26) 369.63,389.63 ; v1@355,375 390,410 560,410 594,444 v1(594,474) ; 563,1315 630,1382 893,1382 v1(905,1370) ; v1@589.4,469.4 cw(c578.31,458.31) 594,458.31 cw(c609.69,458.31) v1@598.6,469.4 ; 860.34,1382 cw(c860.34,1325.34) v1@900.4,1365.4 ; 896.55,1382 cw(c896.55,1361.55) v1@911.01,1376.01 ; v1@956.58,747.6 ccw(c945.48,758.69) 961.17,758.69 ccw(c976.87,758.69) v1@965.77,747.6 ; v1(961.17,743) 961.17,776.17 ; 1220,240 v1(1270,240) ; v1@1265.4,235.4 ccw(c1254.31,224.31) 1254.31,240 ccw(c1254.31,255.69) v1@1265.4,244.6
  Power w20: 1180,280 1220,240
  Power w25: 355,340 465,230 620,230 v1(670,180) 695,180 795,280 875,280 ; v1@670,181.5 ccw(c670,245.48) 715.24,200.24 ; v1@953.94,401.06 ccw(c936.48,418.52) 961.17,418.52 ; v1(955,400) 955,360 875,280 ; v1@961.17,406.17 v1(961.17,743) ; 1180,280 875,280
  Power w30: v1(55,1190) 55,1120 335,840 335,350 ; v1@310.71,339.29 ccw(c252.06,397.94) 335,397.94 ; 335,345.85 cw(c373.35,345.85) v1@349.37,375.78 ; 335,408.8 ccw(c383.8,408.8) v1@349.29,374.29
  Bottom Layer w10: C28.2@580,491 cw(c567.15,478.15) v1@585.11,475.38 ; C28.2@581.5,510 581.5,489.5 v1@600,471 ; 583.76,487.24 ccw(c594,497.49) v1@594,483 ; R14.1@1110,256.54 1183.46,256.54 1205,235 1335,235 1370,270 JP8.1@1370,326.34 ; R14.1@1120.96,247.54 cw(c1142.67,225.84) 1142.67,256.54 cw(c1142.67,287.24) R14.1@1120.96,265.53 ; 1236.2,235 ccw(c1236.2,273.8) v1@1263.64,246.36 ; v1@1276.36,246.36 ccw(c1303.8,273.8) 1303.8,235 ; JP8.1@1363.24,307.72 cw(c1346.9,291.39) 1370,291.39 cw(c1393.1,291.39) JP8.1@1376.76,307.72
  Bottom Layer w12: v1(905,1370) 941,1370 C27.2@991,1320 ; v1@910.66,1364.34 cw(c924.31,1350.69) 924.31,1370 cw(c924.31,1389.31) v1@910.66,1375.66 ; 966.79,1344.21 cw(c942.58,1320) C27.2@976.82,1320 ; 967.99,1343.01 ccw(c990.5,1365.53) C27.2@990.5,1333.69
VCC_ANA: C6.1 C7.1 C37.2 L1.1 L3.1 L4.1 U3.5 | length 1764.8
  Top Layer w20: L1.1@286.5,1165 v1(370,1165) ; L1.1@288.34,1176.85 ccw(c316.95,1205.45) 316.95,1165
  Power w20: v1(370,1165) 370,1040 445,965 v1(475,965) 550,965 800,1215 800,1310 v1(805,1315) ; 800,1293.27 cw(c826.73,1293.27) v1@807.83,1312.17
  Bottom Layer w8: C6.1@267.24,978.22 C6.1@271.97,973.5
  Bottom Layer w15: v1(805,1315) 810,1320 L3.1@838.5,1320 ; v1@809.6,1310.4 cw(c832.76,1287.24) L3.1@832.76,1320 ; L3.1@839.89,1311.38 ccw(c819.09,1290.58) 819.09,1320 ccw(c819.09,1349.42) L3.1@839.89,1328.62
  Bottom Layer w20: C6.1@256.98,988.49 ccw(c232.19,1013.28) 267.24,1013.28 ; C6.1@267.24,978.22 U3.5@267.24,1052.6 ; 267.24,1016.93 ccw(c307.46,1016.93) C6.1@279.02,988.49 ; C6.1@271.97,973.5 C7.1@346,973.5 C37.2@416,973.5 ; C6.1@282.96,966.44 cw(c299.99,949.41) 299.99,973.5 ; C6.1@282.96,988.49 ccw(c319.16,1024.68) 319.16,973.5 ; C7.1@339.15,966.65 ccw(c322.62,950.11) 322.62,973.5 ccw(c322.62,996.88) C7.1@339.15,980.34 ; C7.1@352.85,966.65 cw(c369.38,950.11) 369.38,973.5 cw(c369.38,996.88) C7.1@352.85,980.34 ; C37.2@409.15,966.65 ccw(c392.62,950.11) 392.62,973.5 ccw(c392.62,996.88) C37.2@409.15,980.34 ; C37.2@416,971 506,971 530,995 ; C37.2@422.85,980.34 ccw(c445.41,1002.9) 445.41,971 ; 450.86,971 cw(c450.86,940.86) v1@472.17,962.17 ; v1@477.83,962.17 cw(c499.14,940.86) 499.14,971 ; L4.1@566.23,978.61 ccw(c530,946.77) 530,995 ; L4.1@568.5,995 530,995
VCC_IN: F1.2 JP1.2 JP2.2 JP3.2 JP4.2 JP5.2 JP6.2 | length 1364.8
  Top Layer w45: JP6.2@1240,600 1338.74,501.26 F1.2@1338.74,420 ; 1290.98,549.02 cw(c1197.39,455.43) F1.2@1329.74,455.43
  Top Layer w55: JP6.2@1240,600 JP5.2@1240,700 JP4.2@1240,800 JP3.2@1240,920 JP2.2@1240,1020 JP1.2@1240,1120
  Bottom Layer w55: JP6.2@1240,600 JP5.2@1240,700 JP4.2@1240,800 JP3.2@1240,920 JP2.2@1240,1020 JP1.2@1240,1120
VCC_UNREG: CONN1.2 CONN2.2 CONN3.2 D1.2 F1.1 | length 2647.3
  Top Layer w10: v1(110,796.85) v1@111.57,798.43
  Top Layer w30: v1@111.57,798.43 CONN1.2@201.1,798.43 ; v1(420,100) CONN3.2@420,201.1 ; 940.32,143.04 ccw(c988.04,143.04) v1@954.29,109.29 ; CONN2.2@940.32,201.1 940.32,124.69 ; v1@954.93,109 cw(c956.04,124.68) 940.31,124.68 ; v1(955,110) 940.32,124.69
  Top Layer w35: v1(110,743) v1(110,796.85)
  Top Layer w45: v1(1129,211.26) v1(1181.26,211.26) F1.1@1181.26,420
  Power w40: v1@109,730 109,729 65,685 65,607 165,507 165,300 245,220 245,135 280,100 v1(420,100) 945,100 v1(955,110) 1055,210 1100,210
  Power w45: v1@109,730 110,731 v1@110,805 ; 1100,210 v1@1180,210
  Bottom Layer w20: v1(275,105) 295,105 367.4,177.4 D1.2@367.4,232.6 ; v1@275,109 ccw(c275,166.94) 315.97,125.97
pads on no net: C14.1 C14.2 C14.7 C14.8 CONN1.0 CONN2.0 CONN3.0 CONN4.0 CONN4.4 CONN4.6 D4.1 D4.3 U4.1 U4.3 U4.4 U4.5 U4.6 U4.7 U4.10 U4.11 U4.13 U4.14 U4.16 U4.17 U4.18 U4.21 U4.23 U4.25 U5.3 U5.4 U5.5 U5.7 U5.10 U5.11 U5.13 U5.14 U5.16 U5.17 U5.18 U5.21 U5.23 U5.25 U8.3 U8.10 U8.11 X1.2 X1.4

## Polygon pours and split planes (outlines as drawn)
GND on Top Layer "Top Layer-GND" (solid, remove dead copper, pour order 1002): 6,1410 6,6 1411,6 1411,1410
VCC on Power "Power Layer-VCC" (solid, remove dead copper, pour order 1000): 30,1385.04 35,1390 1385,1390 1385,31 35,31 35,1385.04 30,1390
GND on Ground "Ground Layer-GND" (solid, remove dead copper, pour order 1000): 1400,1400 1400,15 15,15 15,1400
GND on Bottom Layer "Bottom Layer-GND" (solid, remove dead copper, pour order 1001): 12,1405 12,10 1407,10 1407,1405

## Keep-outs
Top Layer:
  circle w3.94: c108.27,108.27 r59.06
  circle w3.94: c108.27,108.27 r106.3
  circle w3.94: c1309.06,108.27 r59.06
  circle w3.94: c1309.06,108.27 r106.3
  circle w3.94: c108.27,1309.06 r59.06
  circle w3.94: c108.27,1309.06 r106.3
  circle w3.94: c1309.06,1309.06 r106.3
  circle w3.94: c1309.06,1309.06 r59.06
Power:
  circle w10: c110,1310 r80
  circle w10: c1310,110 r80
  circle w10: c110,110 r80
  circle w10: c1310,1310 r80
Bottom Layer:
  circle w3.94: c1308.7,1310 r106.3
  circle w3.94: c108.7,1310 r106.3
  circle w3.94: c108.7,110 r106.3
  circle w3.94: c1308.7,110 r106.3

## Other copper
Top Layer:
  rectangle net GND: 877,963 912,1025
  rectangle net NetR12_1: 679.83,432.02 695.23,448.31
  rectangle net VCC: 904,732 944,764
  rectangle net GND: 415,1110 440,1145
  rectangle net GND: 350,1100 430,1130
  rectangle net GND: 345,1200 405,1240
  rectangle net GND: 400,1086.5 440,1260
  rectangle net GND: 300,1075 440,1110
  rectangle net NetC12_1: 300,1290 435,1315
  rectangle net NetC12_1: 330,1015 435,1040
  rectangle net GND: 300,1220 440,1255
  rectangle net GND: 160,250 255,310
  rectangle net GND: 240,225 280,335
  rectangle net GND: 1020,370 1100,415
  rectangle net VCC: 945,348 969,421
  rectangle net VCC: 903,400 960,421
  rectangle net GND: 1020,260 1065,330
  rectangle net GND: 1020,330 1119,380
  rectangle net VCC: 645,160 685,235
  rectangle net VCC: 540,225 685,252
  rectangle net VCC: 300,250 365,440
  rectangle net GND: 540,280 595,370
  rectangle net VCC: 595,455 624.59,496.69
  rectangle net VCC: 931,705 966,800
  pour cut-out: 884.99,1203.44 853.98,1203.48 853.98,1193.55 884.99,1193.55
  pour cut-out: 885,1135 975,1135 975,1325 885,1325
  pour cut-out: 535,1110 535,909.61 706,910 706,1110.39
  pour cut-out: 538,1370 538,1169.61 716,1169.61 716,1370
Power:
  rectangle net VCC: 301,324 376.15,425
  rectangle net VCC_IN: 1205,560 1275,1160
  pour cut-out: 1402,520 1077,520 1077,1234 1404,1234 1405,1230
Bottom Layer:
  rectangle net GND: 733,718 896,797
  rectangle net GND: 585,1205 620,1305
  rectangle net VCC_ANA: 455,950 495,971
  rectangle net GND: 1200,264 1330,300
  rectangle net GND: 410,880 435,905
  rectangle net GND: 240,830 410,930
  rectangle net GND: 550,330 580,380
  rectangle net GND: 1150,280 1340,374
  rectangle net GND: 580,340 710,385
  rectangle net GND: 627,225 647,350
  rectangle net GND: 869,400 911,510
  rectangle net GND: 870,505 911,525
  rectangle net GND: 245,816 410,866
  rectangle net GND: 81,494 173,561
  rectangle net GND: 820,1160 870,1280
  rectangle net NetC31_1: 890,1160 930,1340
  rectangle net GND: 795,1160 820,1180
  rectangle net GND: 791,1033 880,1081
  rectangle net GND: 775,1013 819,1033
  rectangle net GND: 720,1160 824,1200
  rectangle net GND: 804,1158 837,1190
  rectangle net GND: 585,1305 765,1341
  rectangle net GND: 750,1067 805,1102
  rectangle net GND: 775,1025 805,1102
  rectangle net GND: 770,1013 775,1084
  rectangle net GND: 759,1070 799,1190
  rectangle net GND: 614,1089 775,1132
  rectangle net GND: 746,1084 777,1104
  rectangle net GND: 81,434 117,494
  rectangle net GND: 885,500 980,535
  rectangle net VCC: 940,390 980,455
  rectangle net GND: 910,535 960,580
  rectangle net GND: 935,535 980,560
  rectangle net GND: 720,1125 770,1160
  rectangle net GND: 580,1090 620,1220
  rectangle net GND: 866.8,156.55 889,186.55
  pour cut-out: 595.83,315 624,315 624,218 595.83,218 595.72,218.21
  pour cut-out: 900,1105 1080,1105 1080,850 900,850

## Silkscreen, mask and mechanical layers (free items; w line width, h text height)
Top Overlay:
  text "" at 730,1315 h137.8
  text "Z" at 575,1310 h45
  text "-" at 1330,1190 h90
  text "+" at 1225,1185 h80
  text "1" at 1030,1095 h65
  text "Stat" at 185,1070 h60
  text "XY" at 570,1050 h45
  text "2" at 1030,995 h65
  text "Pwr" at 185,990 h60
  text "3" at 1030,895 h65
  text "4" at 1030,770 h65
  text "5" at 1035,670 h65
  text "6" at 1035,570 h65
  text "Sig" at 1105,505 h50
  text "-" at 1330,500 h90
  text "+" at 1225,495 h80
  text "SBL" at 1100,165 h50
  text "Flexi" at 195,55 h55
  text "3.3V" at 1105,25 h40
  text "Port" at 200,15 h55
Bottom Overlay:
  region: 1241,244 1241,184 1206,204 1206,224
  text "C" at 490,1310 h160
  text "-" at 1330,1190 h90
  text "+" at 1225,1185 h80
  text "A" at 950,590 h300
  text "www.CopterControl.org" at 35,420 h60 r270
  text "JTAG" at 1335,184 h40
  text "Copter" at 490,120 h80
  text "Control" at 490,50 h80
Mechanical 1:
  the board outline again, w10

## Dimensions
0,-19.68 to 1417.32,-29.53 on Dimensions
108.27,-19.68 to 1309.06,-19.68 on Dimensions
-19.68,108.27 to -19.68,1309.06 on Dimensions
-19.68,0 to -19.68,1417.32 on Dimensions
1267.3,1350.81 to -2431.73,-1944.73 on Dimensions